# Altium PCB PCB2.PcbDoc
Units mm, origin at the board's own origin, x right, y up, seen from the top; angles counter-clockwise.
Board outline 70 x 20 mm, 2 copper layers (Top Layer, Bottom Layer); 6 components, 9 nets, 75 pads, 1 vias.
Unrouted connection lines stored in the file: 4.
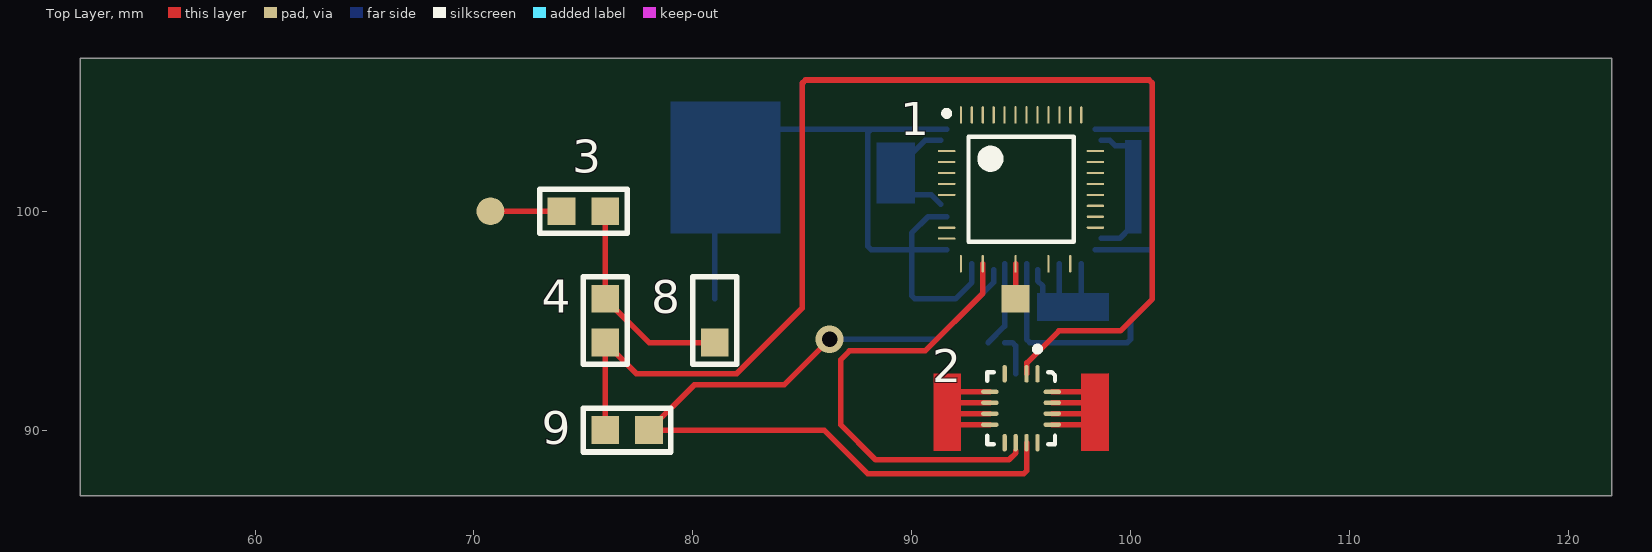
[diagram p0: Top Layer view]
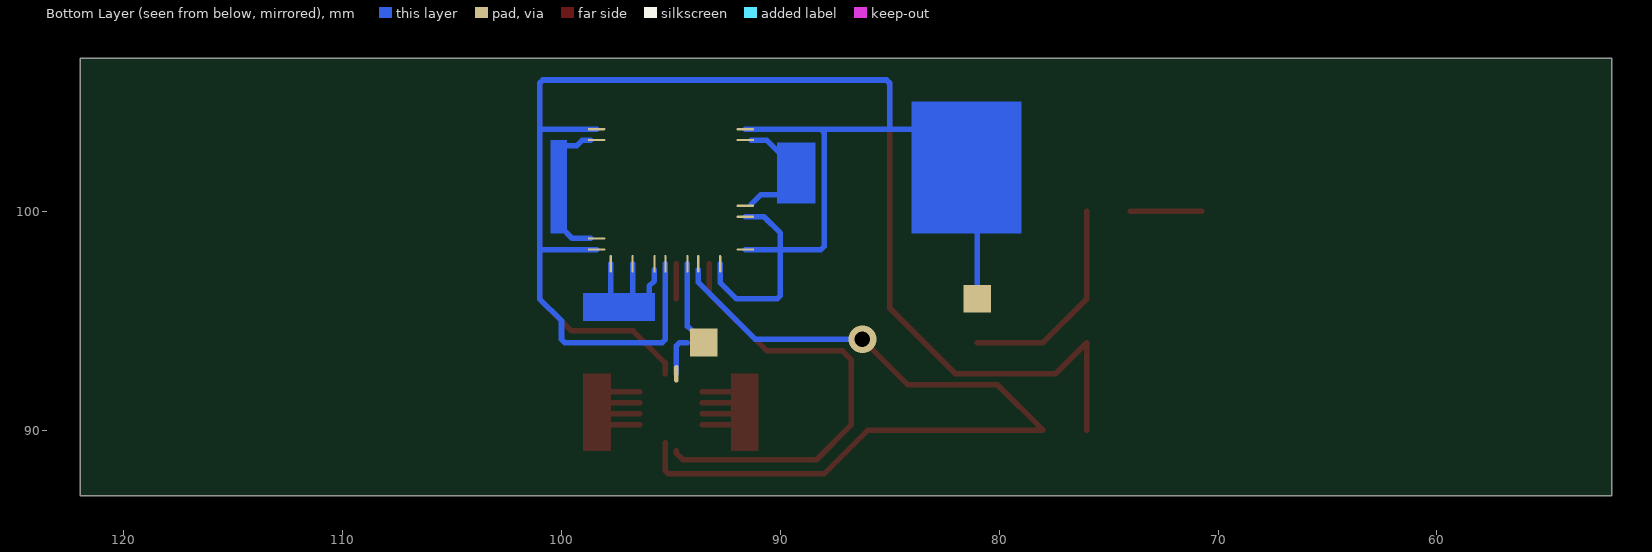
[diagram p1: Bottom Layer view, seen from below]

## Layer stack, top to bottom
Top Solder: solder mask 0.0102, Solder Resist, Dk 3.5
Top Layer: signal copper 0.0356
Dielectric 1: dielectric 0.32, FR-4, Dk 4.8
Bottom Layer: signal copper 0.0356
Bottom Solder: solder mask 0.0102, Solder Resist, Dk 3.5

## Board outline
52,87 122,87 122,107 52,107

## Design rules (kind name [scope] priority, off if disabled: settings)
Clearance [All] p1: gap=0.254 ignorepadtopadclearanceinfootprint=FALSE except(0: Arc-Hole Track-Hole SMDPad-Hole THPad-Hole Via-Hole Fill-Hole Poly-Hole Region-Hole Text-Hole)
PolygonConnect [All] p1: connectstyle=Relief reliefconductorwidth=0.254 reliefentries=4 polygonreliefangle="90 Angle" airgapwidth=0.254
RoutingVias [All] p1: holewidth=0.711 width=1.27 viastyle="Through Hole" minholewidth=0.711 minwidth=1.27 maxholewidth=0.711 maxwidth=1.27
SilkToSolderMaskClearance [IsPad] p1: minsilkscreentomaskgap=1 clearancetoexposedcopper=FALSE
SolderMaskExpansion [All] p1: expansion=0.102
Width [All] p1: maxlimit=0.254 minlimit=0.1 preferedwidth=0.254 minimp=50.000000 maximp=50.000000 favimp=50.000000
29 further rules are at their usual default settings.

## Components (designator, comment, footprint, x,y, rotation, side; value= is the part's Value field where it differs from the comment)
1 "ADC" ADS61B49 95,101 r0 top
2 "OA" ADA4932-1 95,91 r270 top
3 "R 16K" R0805 74,100 r0 top
4 "C 1p" Ñ0805#1 76,96 r270 top
8 "C 1p" Ñ0805#2 81,96 r270 top
9 "R 5K1" R0805 76,90 r0 top

## Footprints (in the part's own frame and the unit in brackets; to place one, negate y for a bottom-side part, rotate by r counter-clockwise, add the part's x,y. Pads: shape width x height; smd on the part's side, far side on the other; paste and mask are expansions set on the pad)
ADA4932-1 [mm]
  oval 0.8x0.2 smd: 1(-1.575,0.75) 2(-1.575,0.25) 4(-1.575,-0.75) 9(1.575,-0.75) 10(1.575,-0.25) 11(1.575,0.25) 12(1.575,0.75)
  oval 0.8x0.2 smd far side: 3(-1.575,-0.25)
  oval 0.2x0.8 smd: 5(-0.75,-1.425) 6(-0.25,-1.425) 7(0.25,-1.425) 8(0.75,-1.425) 13(0.75,1.425) 14(0.25,1.425) 15(-0.25,1.425) 16(-0.75,1.425)
  silkscreen extent -2.82,-1.55 1.65,1.55, body extent -1.5,-1.37 1.5,1.38, height 1
ADS61B49 [mm]
  oval 0.8x0.1 smd far side: 1(-3.4,2.75) 2(-3.4,2.25) 8(-3.4,-0.75) 9(-3.4,-1.25) 12(-3.4,-2.75) 25(3.4,-2.75) 26(3.4,-2.25) 35(3.4,2.25) 36(3.4,2.75)
  oval 0.8x0.1 smd: 3(-3.4,1.75) 4(-3.4,1.25) 5(-3.4,0.75) 6(-3.4,0.25) 7(-3.4,-0.25) 10(-3.4,-1.75) 11(-3.4,-2.25) 27(3.4,-1.75) 28(3.4,-1.25) 29(3.4,-0.75) 30(3.4,-0.25) 31(3.4,0.25) 32(3.4,0.75) 33(3.4,1.25) 34(3.4,1.75)
  oval 0.1x0.8 smd: 13(-2.75,-3.4) 15(-1.75,-3.4) 18(-0.25,-3.4) 21(1.25,-3.4) 23(2.25,-3.4) 37(2.75,3.4) 38(2.25,3.4) 39(1.75,3.4) 40(1.25,3.4) 41(0.75,3.4) 42(0.25,3.4) 43(-0.25,3.4) 44(-0.75,3.4) 45(-1.25,3.4) 46(-1.75,3.4) 47(-2.25,3.4) 48(-2.75,3.4)
  oval 0.1x0.8 smd far side: 14(-2.25,-3.4) 16(-1.25,-3.4) 17(-0.75,-3.4) 19(0.25,-3.4) 20(0.75,-3.4) 22(1.75,-3.4) 24(2.75,-3.4)
  silkscreen extent -3.52,-2.4 2.4,3.6, body extent -2.8,-2.8 2.8,2.8, height 1
R0805 [mm]
  rect 1.27x1.27 smd: 1(0,0) 2(2,0)
  silkscreen extent -1,-1 3,1
Ñ0805#1 [mm]
  rect 1.27x1.27 smd: 1(0,0) 2(2,0)
  silkscreen extent -1,-1 3,1
Ñ0805#2 [mm]
  rect 1.27x1.27 smd far side: 1(0,0)
  rect 1.27x1.27 smd: 2(2,0)
  silkscreen extent -1,-1 3,1

## Part data
3: library part R, "16K"
4 8: library part C
9: library part R

## Free pads (board coordinates)
  round 1.27 smd: 2(70.75,100)
  rect 1.27x1.27 smd far side: 3(93.5,94)
  rect 1.27x1.27 smd: 4(94.75,96)

## Via types
v1: diameter 1.27, hole 0.711, Top Layer to Bottom Layer, 1 vias

## Nets (pads, with @x,y where several pads share a name; then routed paths per layer and width w, separated by ;. In a path a pad name is that pad's centre, name@x,y a point inside that pad or via, vN(x,y) a via of type N, cw(c..) or ccw(c..) an arc to the next point about the centre after c; other vN are vias at no path point)
+3.3: 1.2 1.8 1.18 1.20 1.22 1.24 1.26 1.35 pad.4 | length 13.1
  Top Layer w0.254: pad.4 1.18
  Bottom Layer w0.254: 89.75,100.75 90.904,100.75 91.327,100.327 ; 89.75,102.75 90.125,102.75 90.617,103.242 1.2@91.327,103.242 ; 1.20@95.758,97.327 95.758,96.819 96,96.577 96,96 ; 96.75,96.125 1.22 ; 1.24 97.75,95.875 98,95.625 ; 1.26@98.673,98.758 99.508,98.758 100,99.25 ; 1.35@98.673,103.242 99.055,103.242 99.297,103 100,103
+5: 2.5 2.6 2.7 2.8 | length 7.8
  Top Layer w0.254: 91.6,90.75 2.7 ; 91.6,91.25 2.6 ; 91.625,90.25 2.8 ; 91.625,91.75 2.5
-5: 2.13 2.14 2.15 2.16 | length 7.8
  Top Layer w0.254: 2.13 98.375,90.25 ; 2.14 98.375,90.75 ; 2.15 98.4,91.25 ; 2.16 98.375,91.75
GND: 1.1 1.9 1.12 1.14 1.17 1.19 1.25 1.36 2.3 8.1 pad.3 | length 80
  Bottom Layer w0.254: 8.1 81,101 ; 84,103.75 85,103.75 ; 1.12 90,98.25 ; 1.9 90.75,99.75 90,99 90,98.25 ; 1.1 88.149,103.75 ; 1.14 92.75,96.75 92,96 90.149,96 90,96.149 90,98.25 ; pad.3 94.25,94.75 1.17 ; 94.25,94 94.601,94 94.75,93.851 2.3 ; 1.19 95.25,94.149 95.399,94 99.851,94 100,94.149 100,95 101,96 101,98.25 ; 1.25 101,98.25 ; 1.36 101,103.75 ; 85,103.75 88.149,103.75 ; 85,103.75 85,105.851 85.149,106 100.851,106 101,105.851 101,103.75 ; 88.149,103.75 88,103.601 88,98.399 88.149,98.25 90,98.25 ; 101,98.25 101,103.75
Net1_15: 1.15 2.10 | length 21
  Top Layer w0.254: 1.15 93.25,96.25 90.619,93.619 87.157,93.619 86.75,93.212 86.75,90.25 88.356,88.644 94.449,88.644 94.761,88.956 2.10@94.761,89.066
Net1_16: 1.16 2.11 9.2 | length 38.6
  Top Layer w0.254: v1(86.25,94.149) 84.168,92.067 80.067,92.067 9.2 86,90 88,88 95.12,88 95.269,88.149 95.269,89.406 2.11
  Bottom Layer w0.254: v1(86.25,94.149) 91.141,94.149 93.742,96.75 1.16@93.742,97.327
Net2_2: 2.2 4.2 9.1 | length 58.5
  Top Layer w0.254: 9.1 4.2 77.425,92.575 82,92.575 85,95.575 85,105.851 85.149,106 100.851,106 101,105.851 101,96 99.537,94.537 96.732,94.537 95.269,93.074 95.269,92.594 2.2
Net3_1: 3.1 pad.2 | length 3.2
  Top Layer w0.254: pad.2 3.1
Net3_2: 3.2 4.1 8.2 | length 9.8
  Top Layer w0.254: 3.2 4.1 78,94 8.2
pads on no net: 1.3 1.4 1.5 1.6 1.7 1.10 1.11 1.13 1.21 1.23 1.27 1.28 1.29 1.30 1.31 1.32 1.33 1.34 1.37 1.38 1.39 1.40 1.41 1.42 1.43 1.44 1.45 1.46 1.47 1.48 2.1 2.4 2.9 2.12

## Polygon pours and split planes (outlines as drawn)
no net on Top Layer (solid, pour order 16): 69.25,99.5
no net on Top Layer "Top Layer-No Net" (solid, pour order 14): 95.25,96.463
no net on Bottom Layer (solid, pour order 18): 92.5,94.75

## Other copper
Top Layer:
  region net +5: 92.25,92.575 91,92.575 91,89.066 92.25,89.066
  region net -5: 97.75,92.575 97.75,89.066 99,89.066 99,92.594
  region net -5: 98.4,91.25
Bottom Layer:
  region net +3.3: 99.75,103.25 100.5,103.25 100.5,99 99.75,99
  region net -5: 99.5,103.25
  region net +3.3: 90.149,100.375 88.399,100.375 88.399,103.125 90.149,103.125
  region net -5: 99.25,103.25
  region net +3.3: 95.75,96.25 95.75,95 99,95 99,96.25
  region net -5: 95.75,96.25
  region net -5: 95.75,96.25
  region net GND: 79,105 79,99 84,99 84,105